# EAGLE board charger_v3.1 (EAGLE 9.6.1)
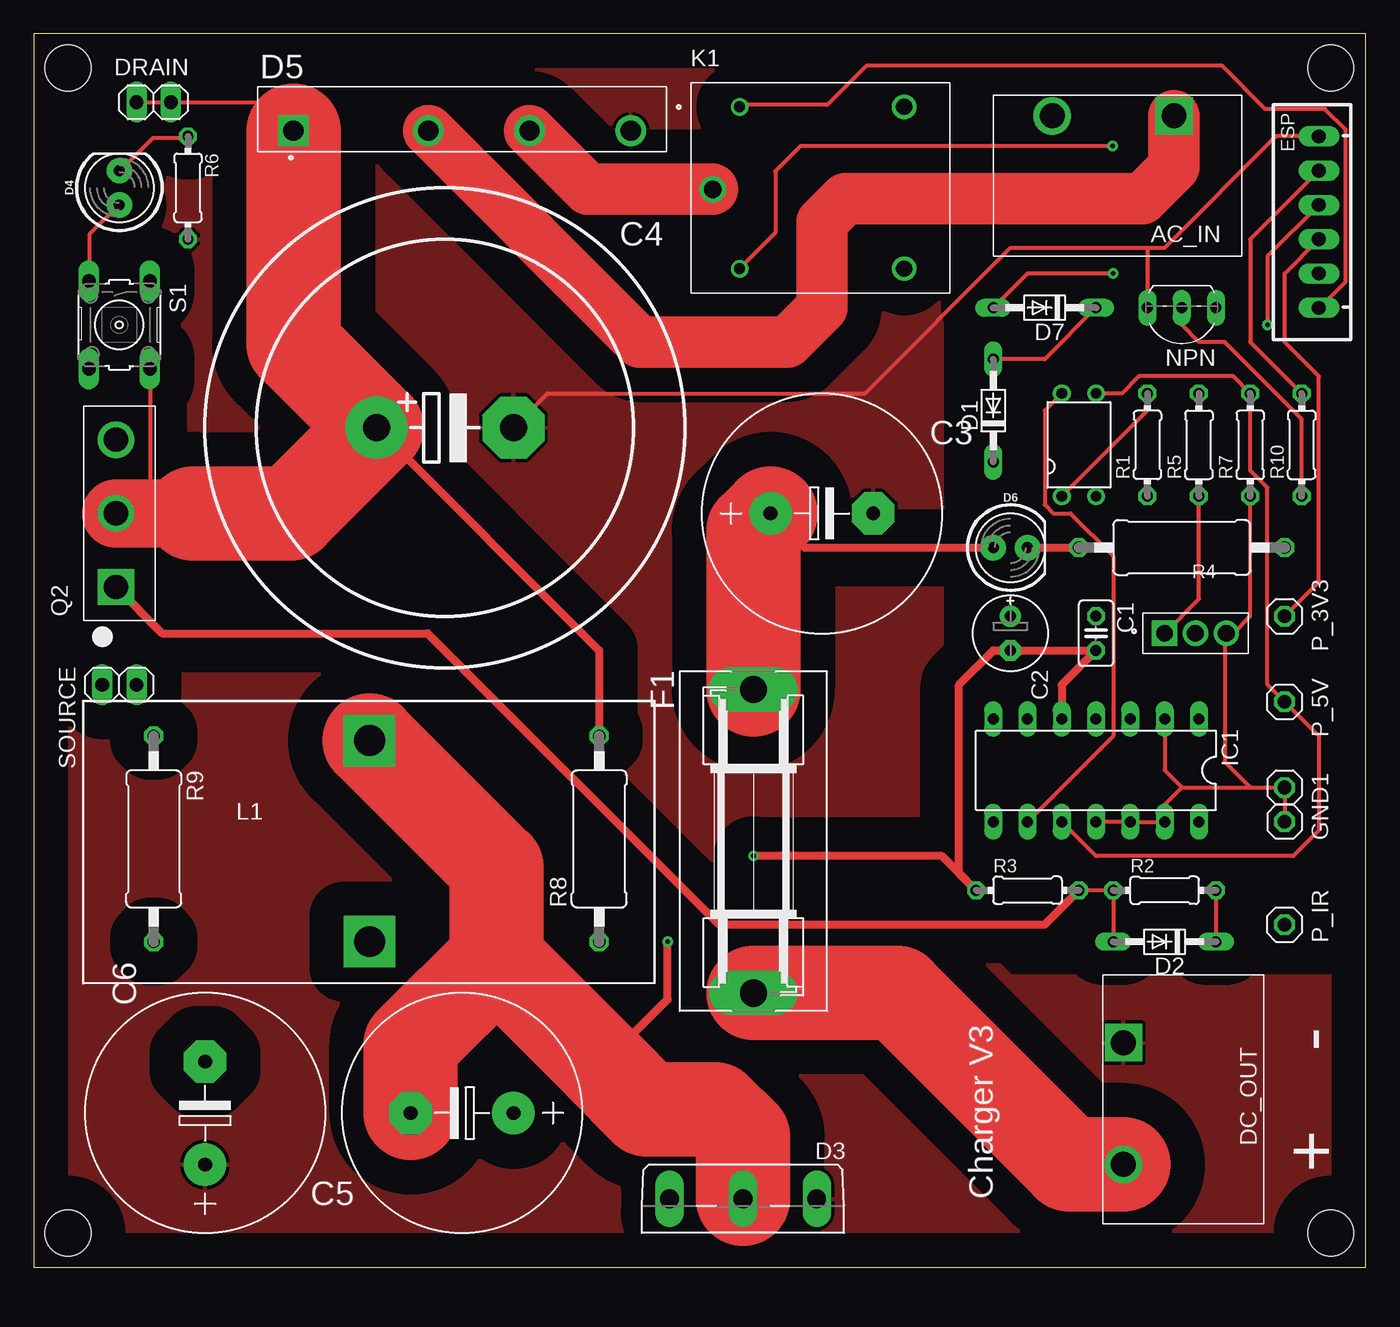
[diagram p0: board, top side]
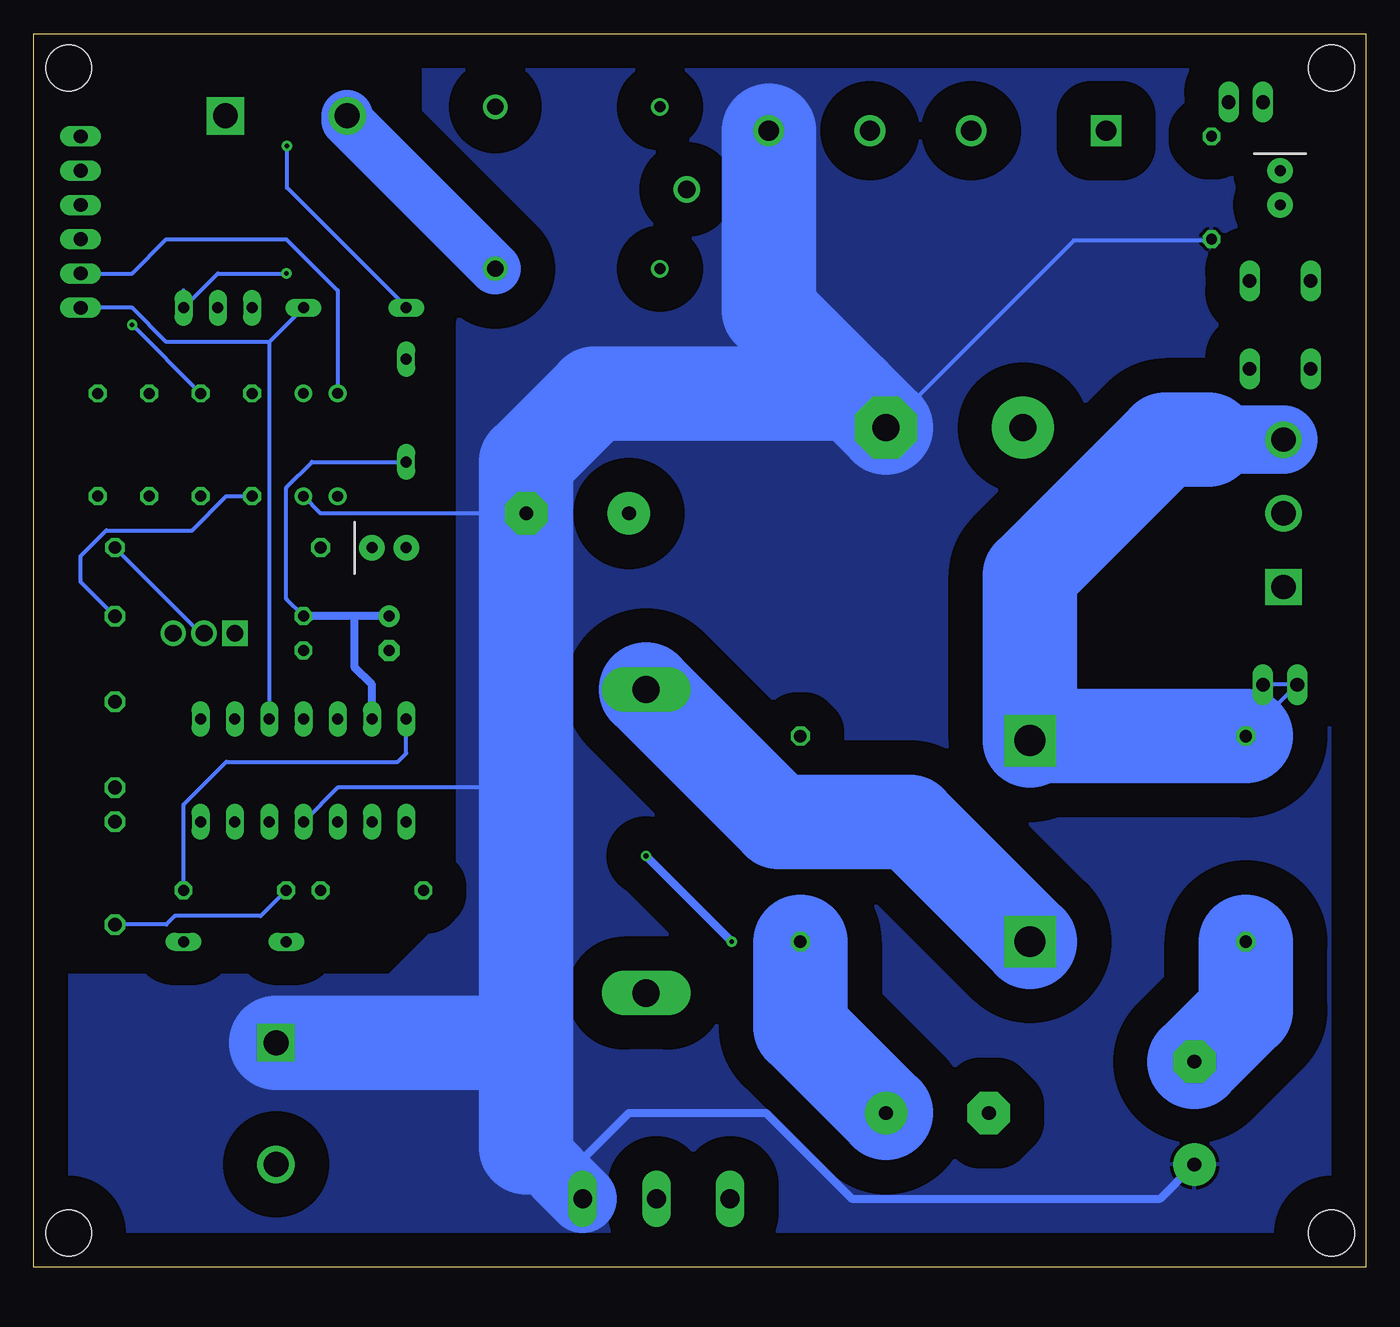
[diagram p1: board, bottom side, seen from below]

Size 98.73 x 91.43 mm. Coordinates in mm from the lower left corner, seen from the top.
Outline: 0,0 98.73,0 98.73,91.43 0,91.43 0,0
Copper layers (1*16): Top 0.035mm / dielectric 1.5mm / Bottom 0.035mm
Design rules "default *": minimum track width 12mil, minimum drill 0.35mm, track to track 12mil, track to pad 12mil, pad to pad 12mil, via to via 12mil, smd to smd 12mil, copper to edge 40mil, drill to drill 6mil, minimum pad ring 10mil, minimum via ring 8mil, stop-mask expansion 4mil, vias tented up to drill 0mil, thermal gap 10mil
Net classes: 0 default: width 0.305 mm; 1 power: width 6.985 mm, clearance 0.508 mm to class 0; 2 pwm_12: width 0.305 mm, clearance 0.508 mm to class 0, clearance 0.508 mm to class 1
Holes 3.4 mm at 2.54,88.9 96.14,88.9 2.54,2.54 96.14,2.54

## Footprints (pad centres in the part's own frame; a part is rotated, then mirrored left to right if it is on the bottom)
TE_1977477-2 = drill 1.85 square: 1 -3.241,-5.334 | drill 1.85: 2 5.781,-5.334
C025-025X050 = drill 0.813 octagon: 1 -1.27,0; 2 1.27,0
E2,5-6E = drill 0.813 pad 1.575: + -1.27,0 | drill 0.813 pad 1.575 octagon: - 1.27,0
E7,5-18 = drill 1.016 pad 3.15: + -3.81,0 | drill 1.016 pad 3.15 octagon: - 3.81,0
EB35D = drill 2.007 pad 4.597: + -5.08,0 | drill 2.007 pad 4.597 octagon: - 5.08,0
DO34-7 = drill 0.813 long: A 3.81,0; C -3.81,0
SOT93S = drill 1.397 long: A1 -5.461,-2.54; A2 5.461,-2.54; C 0,-2.54
LED_5MM = drill 0.813 pad 1.88: A -1.27,0; K 1.27,0
DIOB_GBJ3510-BP = drill 1.51 pad 2.27 square: 1 -12.5,-0.85 | drill 1.51 pad 2.27: 2 -2.5,-0.85; 3 5,-0.85; 4 12.5,-0.85
1X02 = drill 1.016 long: 1 -1.27,0; 2 1.27,0
JST-XH-06-PACKAGE-LONG-PAD = drill 1.016 long: 1 -6.35,0; 2 -3.81,0; 3 -1.27,0; 4 1.27,0; 5 3.81,0; 6 6.35,0
FUSEHOLDER = drill 2.007 pad 3.302 long: 1 -11.252,0; 2 11.252,0
1X01 = drill 1.016 octagon: 1 0,0
DIL14 = drill 0.813 long: 1 -7.62,-3.81; 2 -5.08,-3.81; 3 -2.54,-3.81; 4 0,-3.81; 5 2.54,-3.81; 6 5.08,-3.81; 7 7.62,-3.81; 8 7.62,3.81; 9 5.08,3.81; 10 2.54,3.81; 11 0,3.81; 12 -2.54,3.81; 13 -5.08,3.81; 14 -7.62,3.81
RELAY_SRD-12VDC-SL-C = drill 0.8: COIL1 -6.1,6; COIL2 -6.1,-6 | drill 1.3: COM -8.1,-0.12 | drill 1.2: NC 6.1,6; NO 6.1,-6
TJ7-U1 = drill 2.286 pad 3.81 square: 1 -6.503,4.826; 2 8.408,4.826
TO92-CBE = drill 0.813 long: B 0,0; C -2.54,0; E 2.54,0
DIP4 = drill 0.8: 1 -1.27,-3.81; 2 1.27,-3.81; 3 1.27,3.81; 4 -1.27,3.81
TO247AC = drill 1.79 pad 2.69 square: 1 -5.46,0.255 | drill 1.79 pad 2.69: 2 0,0.255; 3 5.46,0.255
TO229P780X300X1364-3 = drill 1.25 square: 1 0,0 | drill 1.25: 2 2.29,0; 3 4.58,0
0204/7 = drill 0.813 octagon: 1 -3.81,0; 2 3.81,0
0411/15 = drill 0.914 octagon: 1 -7.62,0; 2 7.62,0
B3F-10XX = drill 1.016 long: 1 -3.251,2.261; 2 3.251,2.261; 3 -3.251,-2.261; 4 3.251,-2.261

## Placement (x,y rotation side)
AC_IN  1977477-2  [TE_1977477-2]  81.28,80.01 180 top
C1  100nF  [C025-025X050]  78.74,46.99 270 top
C2  22uF  [E2,5-6E]  72.39,46.99 270 top
C3  150uF  [E7,5-18]  58.42,55.88 0 top
C4  470uF  [EB35D]  30.48,62.23 0 top
C5  22uF  [E7,5-18]  31.75,11.43 180 top
C6  22uF  [E7,5-18]  12.7,11.43 90 top
D1  UF4007  [DO34-7]  71.12,63.5 90 top
D2  UF4007  [DO34-7]  83.82,24.13 180 top
D3  PBYR3035  [SOT93S]  52.58,2.54 180 top
D4  [LED_5MM]  6.35,80.01 90 top
D5  GBJ3510-BP  [DIOB_GBJ3510-BP]  31.75,85.09 0 top
D6  [LED_5MM]  72.39,53.34 0 top
D7  UF4007  [DO34-7]  74.93,71.12 180 top
DC_OUT  1977477-2  [TE_1977477-2]  86.11,13.4 270 top
DRAIN  [1X02]  8.89,86.36 180 top
ESP  JST-XH-06-PIN-LONG-PAD  [JST-XH-06-PACKAGE-LONG-PAD]  95.25,77.47 90 top
F1  [FUSEHOLDER]  53.34,31.57 270 top
GND1  [1X01]  92.71,33.02 0 top
GND2  [1X01]  92.71,35.56 0 top
IC1  IR2110D  [DIL14]  78.74,36.83 180 top
K1  SRD-12VDC-SL-C  [RELAY_SRD-12VDC-SL-C]  58.42,80.01 0 top
L1  1mH  [TJ7-U1]  20.07,32.54 270 top
NPN  [TO92-CBE]  85.09,71.12 180 top
OK1  SFH618A-5  [DIP4]  77.47,60.96 0 top
P_3V3  [1X01]  92.71,48.26 90 top
P_5V  [1X01]  92.71,41.91 90 top
P_IR  [1X01]  92.71,25.4 90 top
Q2  IRFP240  [TO247AC]  6.35,55.88 90 top
Q3  MJE13003G  [TO229P780X300X1364-3]  83.82,46.99 0 top
R1  180  [0204/7]  82.55,60.96 90 top
R2  10  [0204/7]  83.82,27.94 0 top
R3  1k  [0204/7]  73.66,27.94 180 top
R4  68k  [0411/15]  85.09,53.34 180 top
R5  2.7k  [0204/7]  86.36,60.96 270 top
R6  10k  [0204/7]  11.43,80.01 270 top
R7  1k  [0204/7]  90.17,60.96 90 top
R8  31  [0411/15]  41.91,31.75 90 top
R9  31  [0411/15]  8.89,31.75 270 top
R10  6k  [0204/7]  93.98,60.96 270 top
S1  [B3F-10XX]  6.35,69.85 270 top
SOURCE  [1X02]  6.35,43.18 180 top

## Library data of the parts
AC_IN DC_OUT = terminal_block_TA; AVAILABILITY: In Stock; COMMENT: 1977477-2; DESCRIPTION: Conn Barrier Strip 2 POS 8.25mm Solder ST Thru-Hole 15A/Contact Carton; MF: TE Connectivity; MP: 1977477-2; PACKAGE: None; PRICE: None; PURCHASE-URL: https://pricing.snapeda.com/search/part/1977477-2/?ref=eda
C1-C6 = rcl; SPICEPREFIX: C
D1-D3 D7 = diode
D4 D6 = Sparkfun_LED
D5 = GBJ3510-BP; AVAILABILITY: In Stock; DESCRIPTION: Bridge Rectifier Single Phase Standard 1 kV Through Hole GBJ; MF: Micro Commercial; MP: GBJ3510-BP; PACKAGE: SIP-4 Micro Commercial Co; PRICE: None; PURCHASE-URL: https://pricing.snapeda.com/search/part/GBJ3510-BP/?ref=eda
DRAIN GND1 GND2 P_3V3 P_5V P_IR SOURCE = pinhead
ESP = Rembrandt Electronics - JST XH Connectors v1-0
F1 = TA_library; MPN: 0031.7701.11; OC_FARNELL: unknown; OC_NEWARK: 04F1224
IC1 = irs
K1 = TA_library; AVAILABILITY: Not in stock; DESCRIPTION: General Purpose Non Latching 12VDC SPDT Through Hole Relays RoHS; MF: Songle Relay; MP: SRD-12VDC-SL-C; PACKAGE: Package; PRICE: None
L1 = custom_inductor; SPICEPREFIX: L
NPN = transistor
OK1 = optocoupler; MF: VISHAY/TELEFUNKEN; MPN: SFH618A-5; OC_FARNELL: 1469593; OC_NEWARK: 59K0259
Q2 = IRFP240(TO-247); AVAILABILITY: In Stock; DESCRIPTION: N-Channel 200 V 20A (Tc) 150W (Tc) Through Hole TO-247AC; MF: Vishay Siliconix; MP: IRFP240; PACKAGE: TO-247 Vishay Siliconix; PRICE: None
Q3 = MJE13003G; AVAILABILITY: Not in stock; DESCRIPTION: Bipolar (BJT) Transistor NPN 400 V 1.5 A 10MHz 1.4 W Through Hole TO-126; MF: ON Semiconductor; MP: MJE13003G; PACKAGE: TO-126 ON Semiconductor; PRICE: None
R1-R10 = rcl; SPICEPREFIX: R
S1 = switch-omron; MPN: B3F-1000; OC_FARNELL: 176432; OC_NEWARK: 36M3542

## Nets
5V: ESP.2 IC1.9 OK1.4
12V: D1.A D7.C ESP.1 IC1.3 K1.COIL1
AC_1: D5.3 K1.COM
AC_2: AC_IN.1 D5.2
AC_IN_1: AC_IN.2 K1.NO
GND: C3.- C4.- C6.+ D3.A1 D5.4 DC_OUT.1 ESP.6 GND1.1 GND2.1 IC1.2 IC1.11 IC1.12 IC1.13 NPN.E OK1.2 Q3.3 R6.2 R7.1
HVDC: C4.+ D5.1 DRAIN.1 DRAIN.2 Q2.2 R8.2 S1.2
N$1: D2.C IC1.7 R2.2
N$2: D4.A S1.3
N$3: Q3.2 R4.1
N$4: D6.K R4.2
N$5: Q3.1 R5.2
N$6: C5.+ R8.1
N$7: C6.- R9.2
N$8: D4.K R6.1
N$9: OK1.1 R1.2
N$13: NPN.B R10.2
N$14: D7.A K1.COIL2 NPN.C
NMOS_SOURCE: C1.2 C2.- C5.- D3.C IC1.5 L1.1 Q2.3 R3.2 R9.1 SOURCE.1 SOURCE.2
PWM_5V: IC1.10 OK1.3 P_5V.1 R7.2
PWM_12V [pwm_12]: D2.A P_IR.1 Q2.1 R2.1 R3.1
PWM_SW1: ESP.3 P_3V3.1 R1.1
PWM_SW2: ESP.4 R5.1
RELAY: ESP.5 R10.1
V_OUT: C3.+ D6.A F1.1 L1.2
V_OUT_FUSE: DC_OUT.2 F1.2
VB: C1.1 C2.+ D1.C IC1.6

## Tracks (layer width: path | path; a pad name or v marks a point on that pad's centre or on a via)
5V
  Top 0.305: IC1.9 80.01,39.37 80.01,52.7 76.83,55.88 75.56,55.88 74.93,56.52 74.93,63.5 OK1.4
  Bottom 0.305: OK1.4 76.2,72.39 80.01,76.2 88.9,76.2 91.44,73.66 ESP.2
12V
  Top 0.305: D1.A 74.93,67.31 D7.C | K1.COIL1 52.43,86.16 58.83,86.16 61.72,89.05 88.09,89.05 91.29,85.85 95.71,85.85 97.23,84.33 97.23,73.05 95.25,71.07 ESP.1
  Bottom 0.305: 81.28,68.58 IC1.3 | D7.C 81.28,68.58 | ESP.1 91.44,71.12 88.9,68.58 81.28,68.58
AC_1
  Top 3.81: K1.COM 41.1,79.89 D5.3
AC_2
  Top 3.81: D5.2 44.91,68.58 55.88,68.58 58.42,71.12 58.42,77.47 60.15,79.2 82.18,79.2 84.52,81.53 AC_IN.1
AC_IN_1
  Bottom 3.81: K1.NO 75.5,84.99 AC_IN.2
GND
  Top 0.305: ESP.6 92.08,83.82 83.82,75.56 82.55,75.56 | R7.1 90.17,48.26 88.9,46.99 Q3.3 88.27,46.99 88.27,37.47 90.17,35.56 | GND1.1 GND2.1 90.17,35.56 | IC1.11 IC1.12 IC1.13 83.82,34.29 85.09,35.56 | 82.55,75.56 72.39,75.56 61.59,64.77 38.1,64.77 C4.- | 82.55,75.56 NPN.E | IC1.2 83.82,36.83 85.09,35.56 | 85.09,35.56 90.17,35.56
  Bottom 0.305: C4.- 35.51,62.23 21.64,76.1 11.43,76.1 R6.2 | 12.8,7.52 C6.+ | OK1.2 77.47,55.88 C3.- | 62.23,33.02 64.77,35.56 76.2,35.56 IC1.11 | 62.36,16.64 62.23,16.51 | D3.A1 58.04,8
  Bottom 0.61: 58.04,8 54.61,11.43 44.45,11.43 38.1,5.08 15.24,5.08 12.8,7.52
  Bottom 5.08: D3.A1 61.85,8.89 62.23,8.89
  Bottom 6.985: 62.23,8.89 62.23,16.51 62.23,33.02 C3.- 62.23,59.69 57.15,64.77 38.1,64.77 C4.- 44.25,70.92 D5.4 | DC_OUT.1 62.36,16.64
  pour Top (isolate 2.54): -10.16,99.06 69.85,99.06 69.85,78.74 67.31,76.2 67.31,26.67 72.39,21.59 97.79,21.59 99.06,20.32 99.06,-6.35 -10.16,-6.35
  pour Bottom (isolate 2.54): -12.7,99.06 69.85,99.06 69.85,77.47 67.31,74.93 67.31,26.67 72.39,21.59 97.79,21.59 99.06,20.32 99.06,-6.35 -12.7,-6.35
HVDC
  Top 0.305: 8.69,58.26 8.69,66.5 S1.2 | 8.73,58.26 8.69,58.26 | D5.1 17.13,86.36 DRAIN.1 DRAIN.2 | Q2.2 8.48,58.26 8.69,58.26
  Top 0.61: R8.2 41.91,45.72 C4.+
  Top 5.08: Q2.2 11.81,55.88
  Top 6.985: D5.1 19.25,68.38 C4.+ 19.05,55.88 11.81,55.88
N$1
  Top 0.305: R2.2 D2.C
  Bottom 0.305: IC1.7 71.12,38.1 71.75,37.47 84.45,37.47 87.63,34.29 R2.2
N$2
  Top 0.305: S1.3 4.12,73.2 4.12,76.56 6.25,78.69 D4.A
N$3
  Bottom 0.305: R4.1 86.36,46.99 Q3.2
N$4
  Top 0.61: D6.K R4.2
N$5
  Top 0.305: R5.2 86.36,49.53 Q3.1
N$6
  Bottom 6.985: R8.1 41.91,17.78 C5.+
N$7
  Bottom 6.985: C6.- 8.89,19.05 R9.2
N$8
  Top 0.305: R6.1 11.43,83.72 8.84,83.72 6.4,81.28 D4.K
N$9
  Top 0.305: R1.2 82.55,63.5 OK1.1
N$13
  Top 0.305: R10.2 93.98,62.87 88.27,68.58 86.36,68.58 85.09,69.85 NPN.B
N$14  (via drill 0.35)
  Top 0.305: v80.01,73.66 73.66,73.66 D7.A | v79.96,83.11 56.84,83.11 54.97,81.23 54.97,76.7 K1.COIL2
  Bottom 0.305: 87.63,72.39 NPN.C 85.09,73.66 v80.01,73.66 | v79.96,83.11 79.96,80.01 71.17,71.22 D7.A
NMOS_SOURCE  (via drill 0.35)
  Top 0.61: IC1.5 76.2,43.18 C1.2 C2.- 71.12,45.72 68.58,43.18 68.58,29.21 R3.2 67.31,30.48 v53.34,30.48 | 42.15,15 46.99,19.84 v46.99,24.13
  Top 6.985: L1.1 34.29,29.64 34.29,22.86 | 34.29,22.86 42.15,15 45.43,11.72 50.51,11.72 52.58,9.65 D3.C | C5.- 27.94,16.51 34.29,22.86
  Bottom 0.305: R9.1 SOURCE.2 SOURCE.1
  Bottom 0.61: v53.34,30.48 v46.99,24.13
  Bottom 5.08: Q2.3 11.68,61.34
  Bottom 6.985: 11.68,61.34 14.86,61.34 24.89,51.31 L1.1 24.56,39.37 R9.1
PWM_5V
  Top 0.305: OK1.3 80.64,64.77 81.92,66.04 88.9,66.04 R7.2 90.17,59.05 91.44,57.78 91.44,43.18 P_5V.1 95.25,39.37 95.25,32.38 93.34,30.48 78.74,30.48 IC1.10
PWM_12V
  Top 0.305: R3.1 R2.1 D2.A
  Top 0.61: Q2.1 9.53,46.99 29.21,46.99 50.8,25.4 74.93,25.4 R3.1
  Bottom 0.305: P_IR.1 88.9,25.4 88.27,26.04 81.92,26.04 R2.1
PWM_SW1
  Top 0.305: ESP.3 92.71,73.66 92.71,68.58 95.25,66.04 95.25,50.8 P_3V3.1
  Bottom 0.305: R1.1 84.45,57.15 87,54.61 93.34,54.61 95.25,52.7 95.25,50.8 P_3V3.1
PWM_SW2  (via drill 0.35)
  Top 0.305: v91.44,69.85 91.44,74.93 ESP.4
  Bottom 0.305: v91.44,69.85 R5.1
RELAY
  Top 0.305: R10.1 90.17,68.58 90.17,76.2 ESP.5
V_OUT
  Top 0.61: C3.+ 57.15,53.34 D6.A
  Top 6.985: C3.+ 53.34,54.61 F1.1
  Bottom 6.985: L1.2 33.78,33.02 43.54,33.02 F1.1
V_OUT_FUSE
  Top 6.985: F1.2 64.01,20.32 76.71,7.62 DC_OUT.2
VB
  Bottom 0.305: D1.C 78.11,59.69 80.01,57.78 80.01,49.53 C1.1
  Bottom 0.61: IC1.6 73.66,43.18 74.93,44.45 74.93,48.26 | 74.93,48.26 C1.1 | C2.+ 74.93,48.26

## Text on the board
tPlace: - | +
tNames: Charger V3